# Altium PCB RC_Remote.PcbDoc
Units mm, origin at the board's own origin, x right, y up, seen from the top; angles counter-clockwise.
Board outline 100.08 x 75.56 mm, 2 copper layers (Top Layer, Bottom Layer); 23 components, 37 nets, 111 pads, 19 vias.
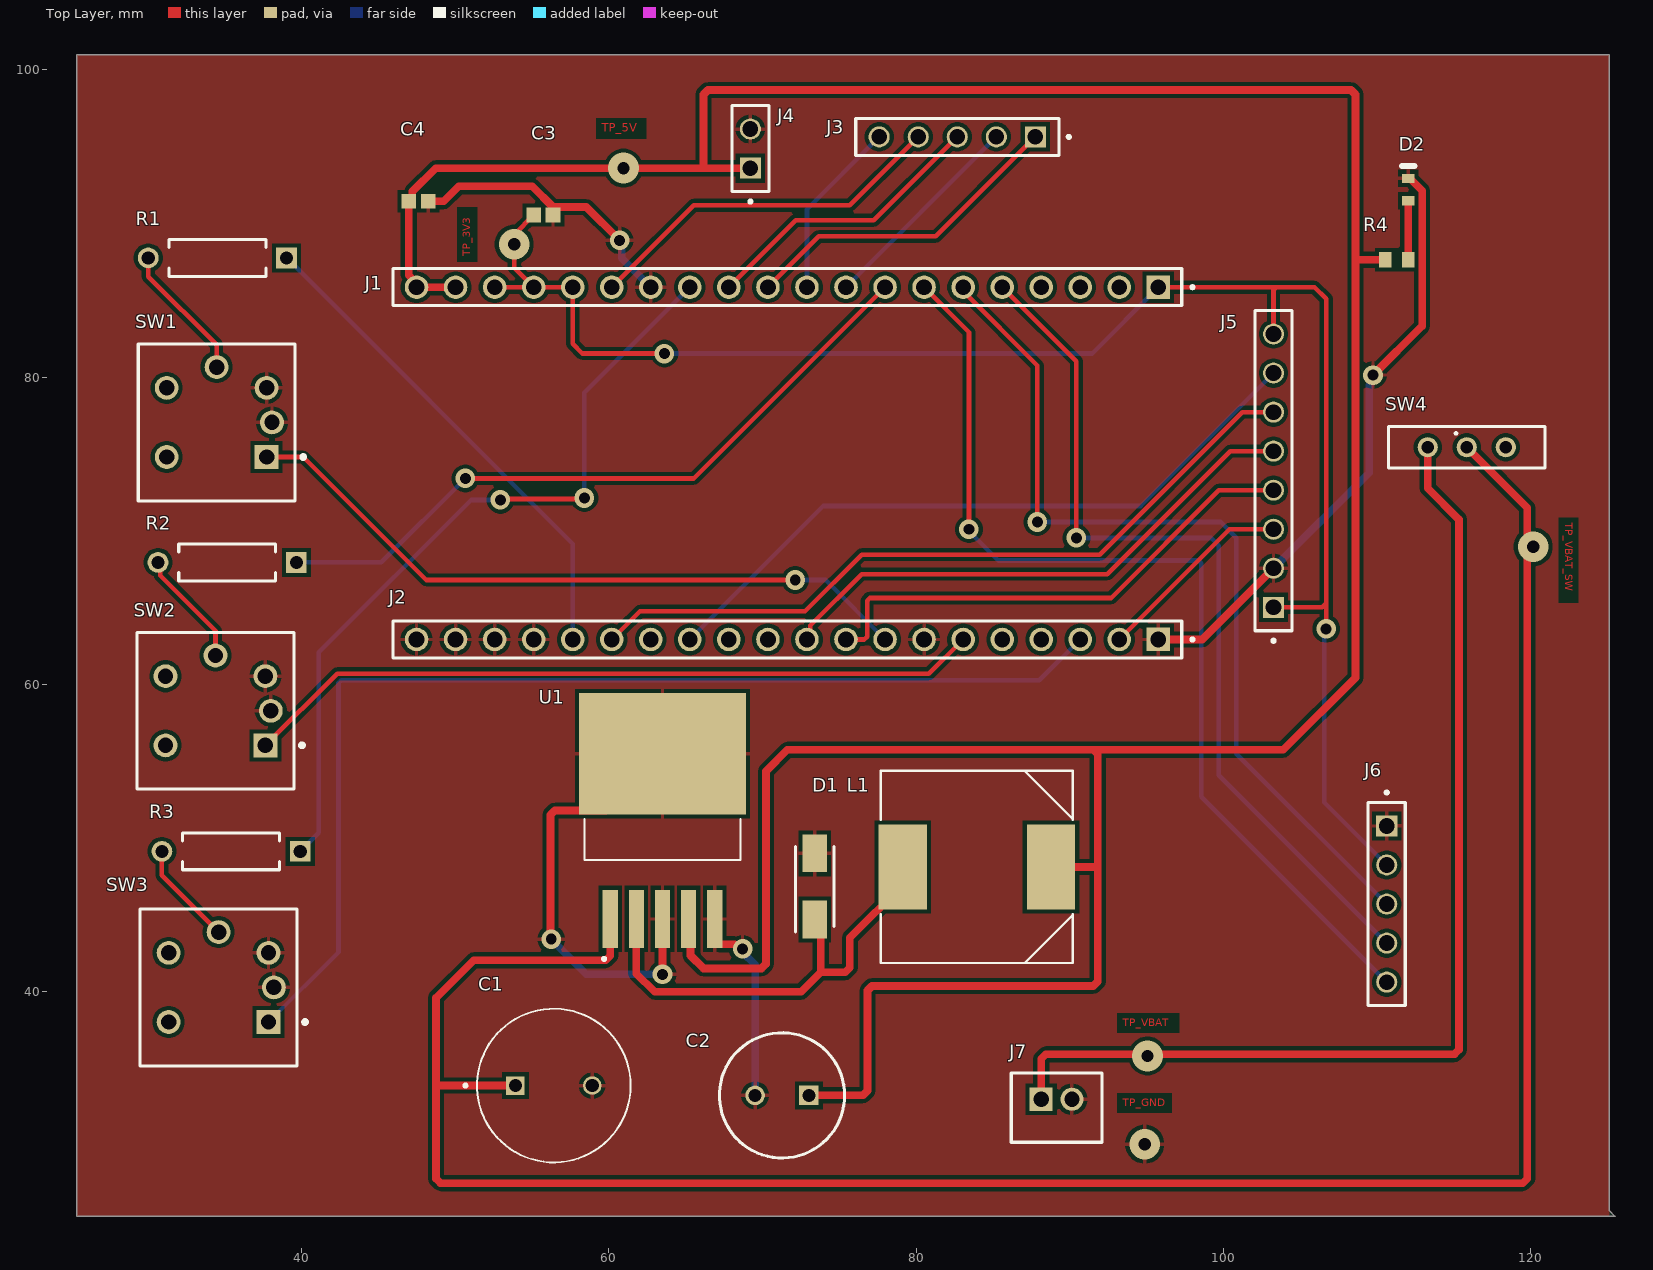
[diagram p0: Top Layer view]
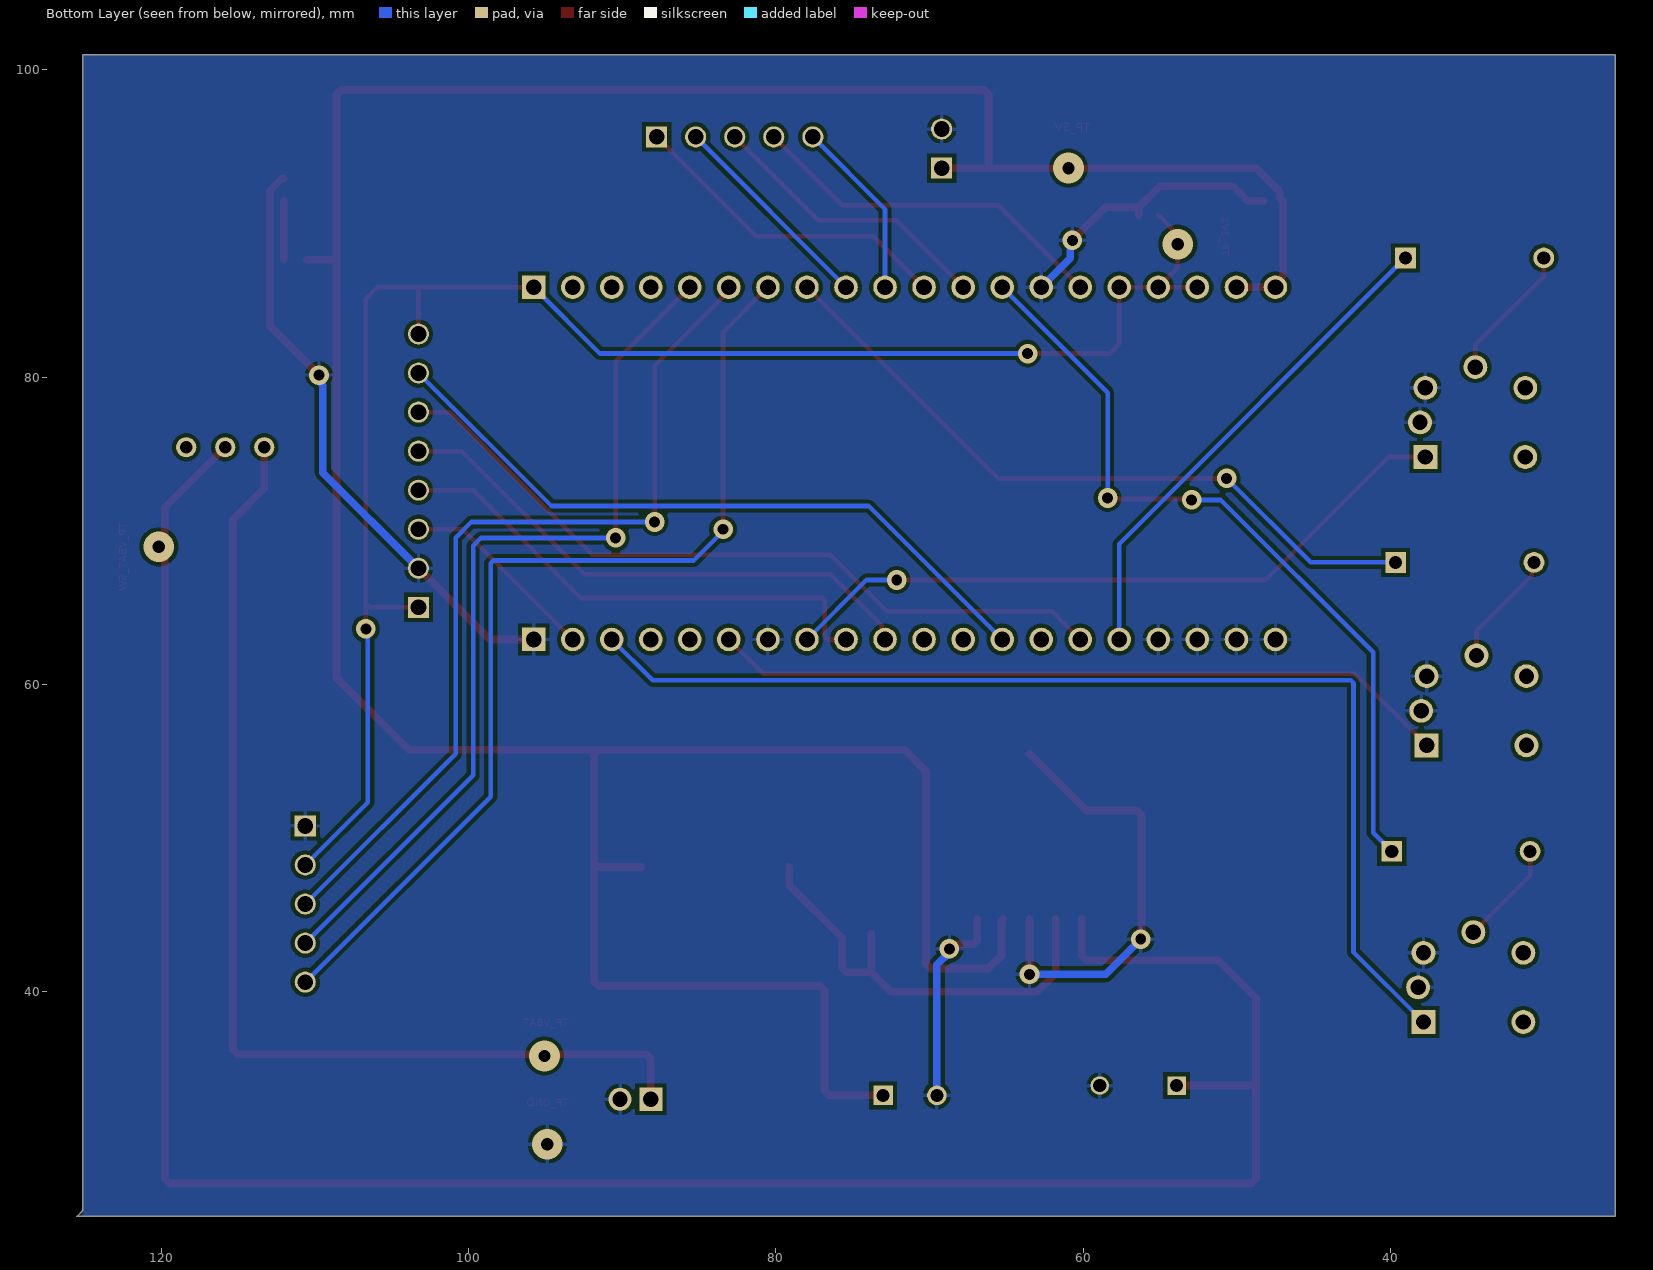
[diagram p1: Bottom Layer view, seen from below]

## Layer stack, top to bottom
Top Solder: solder mask 0.0102, Solder Resist, Dk 3.5
Top Layer: signal copper 0.0356
Dielectric 1: dielectric 0.32, FR-4, Dk 4.8
Bottom Layer: signal copper 0.0356
Bottom Solder: solder mask 0.0102, Solder Resist, Dk 3.5

## Board outline
25.4,25.4 125.476,25.4 125.095,25.781 125.095,100.965 25.4,100.965

## Design rules (kind name [scope] priority, off if disabled: settings)
Clearance [All] p1: gap=0.254 ignorepadtopadclearanceinfootprint=FALSE
MinimumSolderMaskSliver [All] p1: minsoldermaskwidth=0.09
PolygonConnect [All] p1: connectstyle=Relief reliefconductorwidth=0.254 reliefentries=4 polygonreliefangle="90 Angle" airgapwidth=0.254
RoutingVias [All] p1: holewidth=0.711 width=1.27 viastyle="Through Hole" minholewidth=0.711 minwidth=1.27 maxholewidth=0.711 maxwidth=1.27
SilkToSolderMaskClearance [IsPad] p1: minsilkscreentomaskgap=0.1 clearancetoexposedcopper=TRUE
SolderMaskExpansion [All] p1: expansion=0.09 istentingtop=FALSE
Width [All] p1: maxlimit=1 minlimit=0.2 preferedwidth=0.3 minimp=50.000000 maximp=50.000000 favimp=50.000000
28 further rules are at their usual default settings.

## Components (designator, comment, footprint, x,y, rotation, side; value= is the part's Value field where it differs from the comment)
C1 "EEUFM1E681" CAPPRD500W60D1000H2000 56.428,33.909 r0 top
C2 "EEU-FC1E471" CAPPRD350W65D815H2200 73.025,33.274 r180 top
C3 "Capacitor 100 nF +/-10% 50 V 0603" CAPC1608X90X40NL10T20 55.753,90.551 r0 top value=100nF
C4 "Capacitor 100 nF +/-10% 50 V 0603" CAPC1608X90X40NL10T20 47.625,91.44 r0 top value=100nF
D1 "CDBA540-HF" DIOM5225X250N 73.406,46.863 r90 top
D2 "TLMS1100-GS08" VISH-TLMX1100_V 112.014,92.202 r90 top
J1 "ESP32 Left Header" SAMTEC_SSQ-120-XX-X-S 71.628,85.852 r180 top
J2 "ESP32 Right Header" SAMTEC_SSQ-120-XX-X-S 71.628,62.932 r180 top
J3 "nRF24 Signals" SAMTEC_SSQ-105-02-T-S 82.677,95.631 r180 top
J4 "nRF24 Power" SAMTEC_SSQ-102-02-T-S 69.215,94.869 r90 top
J5 "TFT Display" SAMTEC_SSQ-108-02-T-S 103.251,73.914 r90 top
J6 "Joystick" SAMTEC_SSQ-105-02-T-S 110.617,45.72 r270 top
J7 "Battery Connector" JST-B2B-PH-K-S_V 89.138,32.47 r0 top
L1 "DR127-220-R" INDM125125X800N 83.947,48.133 r180 top
R1 "MFR-25FBF52-47R5" RESA60-630X240 34.544,87.757 r180 top value=47.5
R2 "MFR-25FBF52-47R5" RESA60-630X240 35.179,67.945 r180 top value=47.5
R3 "MFR-25FBF52-47R5" RESA60-630X240 35.433,49.149 r180 top value=47.5
R4 "RC0603JR-13150RL" RESC1608X55X25ML10T15 111.264,87.63 r0 top
SW1 "RC Mode" FP-B3W-9002-Y1N-MFG 34.492,77.053 r0 top
SW2 "Auto" FP-B3W-9002-Y1N-MFG 34.417,58.293 r0 top
SW3 "AI" FP-B3W-9002-Y1N-MFG 34.619,40.295 r0 top
SW4 "Power Switch" 450301014042 115.824,75.438 r0 top
U1 "LM2596S-5.0" TO170P1524X483-6N 63.5,51.149 r90 top

## Footprints (in the part's own frame and the unit in brackets; to place one, negate y for a bottom-side part, rotate by r counter-clockwise, add the part's x,y. Pads: shape width x height; smd on the part's side, far side on the other; paste and mask are expansions set on the pad)
450301014042 [mm]
  round 1.308 hole 0.8: 1(0,0) 2(-2.54,0) 3(2.54,0)
  silkscreen extent -5.1,-1.35 5.1,1.35
CAPC1608X90X40NL10T20 [mm] "Chip Capacitor, 2-Leads, Body 1.70x0.90mm, IPC Medium Density"
  rect 0.95x0.95 smd: 1(-0.625,0) 2(0.625,0)
  body extent -0.85,-0.45 0.85,0.45, height 0.9
CAPPRD350W65D815H2200 [mm]
  rect 1.275x1.275 hole 0.85: 1(0,0)
  round 1.275 hole 0.85: 2(3.5,0)
  silkscreen extent -2.33,-4.07 5.82,4.07, body extent -2.49,-4.25 6,4.25, height 22
CAPPRD500W60D1000H2000 [mm]
  round 1.2 hole 0.85: N(2.5,0)
  rect 1.2x1.2 / inner round 1.2 / far side rect 1.2x1.2 hole 0.85: P(-2.5,0)
  silkscreen extent -5.85,-5 5,5, body extent -5,-5 5,5, height 20
DIOM5225X250N [mm]
  rect 2.45x1.6 smd: 1(-2.15,0) 2(2.15,0)
  silkscreen extent -2.95,-1.25 2.6,1.25, body extent -2.6,-1.25 2.6,1.25, height 2.5
FP-B3W-9002-Y1N-MFG [mm]
  rect 1.55x1.55 hole 1 paste-2539.97 mask+0: 1(3.25,-2.25)
  round 1.55 hole 1 paste-2539.97 mask+0: 2(-3.25,-2.25) 3(3.25,2.25) 4(-3.25,2.25) 5(3.6,0) 6(0,3.6)
  silkscreen extent -5.1,-5.1 5.75,5.1, body extent -5.2,-5.2 5.2,5.2, height 0.25
INDM125125X800N [mil]
  rect 124x217 smd: 1(-190,0) 2(190,0)
  silkscreen extent -246,-246 246,246
JST-B2B-PH-K-S_V [mm] "Connector, 2-Leads, Body 5.9x4.5mm, Pitch 2mm"
  rect 1.5x1.5 hole 1: 1(-1,0.55)
  round 1.5 hole 1: 2(1,0.55)
  silkscreen extent -2.95,-2.25 2.95,2.25, body extent -2.95,-2.25 2.95,2.25, height 6
RESA60-630X240 [mm] "Axial Resistor, 2-Leads, Dia 2.4mm, Body Length 6.3mm"
  rect 1.35x1.35 hole 0.85: 1(-4.5,0)
  round 1.35 hole 0.85: 2(4.5,0)
  silkscreen extent -3.15,-1.2 3.15,1.2, body extent -4.77,-1.19 4.77,1.2, height 2.4
RESC1608X55X25ML10T15 [mm] "Chip Resistor, 2-Leads, Body 1.60x0.80mm, IPC Low Density"
  rect 0.8x1 smd: 1(-0.75,0) 2(0.75,0)
  body extent -0.85,-0.45 0.85,0.45, height 0.55
SAMTEC_SSQ-102-02-T-S [mm]
  rect 1.37x1.37 hole 1.02: 01(-1.27,0)
  round 1.37 hole 1.02: 02(1.27,0)
  silkscreen extent -3.54,-1.2 2.8,1.2
SAMTEC_SSQ-105-02-T-S [mm]
  rect 1.37x1.37 / inner round 1.37 / far side rect 1.37x1.37 hole 1.02: 01(-5.08,0)
  round 1.37 hole 1.02: 02(-2.54,0) 03(0,0) 04(2.54,0) 05(5.08,0)
  silkscreen extent -7.35,-1.2 6.61,1.2
SAMTEC_SSQ-108-02-T-S [mm]
  rect 1.37x1.37 / inner round 1.37 / far side rect 1.37x1.37 hole 1.02: 01(-8.89,0)
  round 1.37 hole 1.02: 02(-6.35,0) 03(-3.81,0) 04(-1.27,0) 05(1.27,0) 06(3.81,0) 07(6.35,0) 08(8.89,0)
  silkscreen extent -11.16,-1.2 10.42,1.2
SAMTEC_SSQ-120-XX-X-S [mm]
  rect 1.53x1.53 / inner round 1.53 / far side rect 1.53x1.53 hole 1.02: 01(-24.13,0)
  round 1.53 hole 1.02: 02(-21.59,0) 03(-19.05,0) 04(-16.51,0) 05(-13.97,0) 06(-11.43,0) 07(-8.89,0) 08(-6.35,0) 09(-3.81,0) 10(-1.27,0) 11(1.27,0) 12(3.81,0) 13(6.35,0) 14(8.89,0) 15(11.43,0) 16(13.97,0) 17(16.51,0) 18(19.05,0) 19(21.59,0) 20(24.13,0)
  silkscreen extent -26.45,-1.2 25.66,1.2
TO170P1524X483-6N [mm]
  rect 3.79x0.99 smd: 1(-6.4,3.4) 2(-6.4,1.7) 3(-6.4,0) 4(-6.4,-1.7) 5(-6.4,-3.4)
  rect 7.88x10.84 smd paste-6: 6(4.35,0)
  silkscreen extent -9.1,-5.08 0.09,5.08, body extent -7.18,-5.08 7.18,5.08, height 4.65
VISH-TLMX1100_V [mm] "SMD, 2-Leads, Body 1.6x0.8mm"
  rect 0.6x0.8 smd: 1(-0.725,0) 2(0.725,0)
  silkscreen extent 1.53,-0.4 1.53,0.4, body extent -0.8,-0.4 0.8,0.4, height 0.65

## Part data
C1: "680F 25V Aluminum Electrolytic Capacitors Radial, Can 5000 Hrs @ 105C", Package="RADIAL-2 Panasonic", Check_prices=https://www.snapeda.com/parts/EEUFM1E681/Panasonic/view-part/?ref=eda, Digi-Key_Part_Number=P12390-ND, MF=Panasonic, MP=EEUFM1E681, Purchase-URL=https://pricing.snapeda.com/search?q=EEUFM1E681&ref=eda, SnapEDA_Link=https://www.snapeda.com/parts/EEUFM1E681/Panasonic/view-part/?ref=snap
C2: "Capacitor Polarised", Manufacturer_Name=Panasonic, Mouser Part Number=667-EEU-FC1E471, Arrow Part Number=EEU-FC1E471, Arrow Price/Stock=https://www.arrow.com/en/products/eeu-fc1e471/panasonic?region=europe, Datasheet Link=http://industrial.panasonic.com/cdbs/www-data/pdf/RDF0000/ABA0000C1209.pdf, Height=22mm, Manufacturer_Part_Number=EEU-FC1E471, Mouser Price/Stock=https://www.mouser.co.uk/ProductDetail/Panasonic/EEU-FC1E471?qs=%2FUrJKH1balAe6BYeommeDg%3D%3D
C3 C4: library part CMP-001-00017-6, "Chip Capacitor, 100 nF, +/- 10%, 50 V, 0603 (1608 Metric)", Capacitor Type=Ceramic, Case/Package=0603, Max Operating Temperature=125°C, Min Operating Temperature=-55°C, Tolerance=10%, Voltage Rating=50V, Mounting Technology=SM, Pins=2, RoHS Compliant=True
D1: "Schottky Diode", Manufacturer_Name="Comchip Technology", Mouser Part Number=750-CDBA540-HF, Arrow Part Number=CDBA540-HF, Arrow Price/Stock=https://www.arrow.com/en/products/cdba540-hf/comchip-technology?region=nac, Datasheet Link=https://datasheet.datasheetarchive.com/originals/distributors/DKDS-12/228866.pdf, Height=2.5mm, Manufacturer_Part_Number=CDBA540-HF, Mouser Price/Stock=https://www.mouser.co.uk/ProductDetail/Comchip-Technology/CDBA540-HF?qs=XEIV%2Fho1H6f2kHo2SATLRw%3D%3D
D2: library part CMP-007-00030-2, "Red Led, 20mA, 2.1 V, -40 to 100 degC, 2-Pin SMD (0603), RoHS, Tape and Reel", Case/Package=0603, Colour=Red, Forward Current=20mA, Forward Voltage=2.1V, Manufacturer="Vishay Semiconductor", Max Operating Temperature=100°C, Min Operating Temperature=-40°C, Package Description="2-Pin Surface Mount Device, Body 1.6 x 0.8 mm", Package Quantity=3000, Package Reference=TLMX1100, Power=90mW, Datasheet URL=http://www.vishay.com/docs/83173/tlmb1100.pdf, Datasheet Version="Rev. 2.7, 03/2016", Illumination Colour=Red, Lens Style=Clear, Luminous Intensity=63mcd, Manufacturer URL=http://www.vishay.com/, Mounting Technology=SM, Nominal Vf=2.1V, Packaging=TapeandReel, Pins=2, RoHS Compliant=True, Viewing Angle=160degrees
J1 J2: library part SSQ-120-XX-X-S, "20 Position Receptacle Connector 0.100 (2.54mm) Through Hole Gold", Package=None, Check_prices=https://www.snapeda.com/parts/SSQ-120-22-F-S/Samtec/view-part/?ref=eda, MF=Samtec, MP=SSQ-120-22-F-S, SnapEDA_Link=https://www.snapeda.com/parts/SSQ-120-22-F-S/Samtec/view-part/?ref=snap
J3 J6: library part SSQ-105-02-T-S, "Headers & Wire Housings .100 Tiger Buy Socket Strip, Square Tail", Package=None, Check_prices=https://www.snapeda.com/parts/SSQ-105-02-T-S/Samtec/view-part/?ref=eda, MF=Samtec, MP=SSQ-105-02-T-S, SnapEDA_Link=https://www.snapeda.com/parts/SSQ-105-02-T-S/Samtec/view-part/?ref=snap
J4: library part SSQ-102-02-T-S, "SSQ Series .100 Tiger Buyâ„¢ Socket Strip, Square Tail", Package=None, Availability="In Stock", Check_prices=https://www.snapeda.com/parts/SSQ-102-02-T-S/Samtec+Inc./view-part/?ref=eda, MF="Samtec Inc.", MP=SSQ-102-02-T-S, Price=None, Purchase-URL=https://pricing.snapeda.com/search/part/SSQ-102-02-T-S/?ref=eda, SnapEDA_Link=https://www.snapeda.com/parts/SSQ-102-02-T-S/Samtec+Inc./view-part/?ref=snap
J5: library part SSQ-108-02-T-S, "Headers & Wire Housings .100 Tiger Buy Socket Strip, Square Tail", Package=None, Check_prices=https://www.snapeda.com/parts/SSQ-108-02-T-S/Samtec/view-part/?ref=eda, MF=Samtec, MP=SSQ-108-02-T-S, SnapEDA_Link=https://www.snapeda.com/parts/SSQ-108-02-T-S/Samtec/view-part/?ref=snap
J7: library part CMP-2000-05162-1, "Male Header, Pitch 2 mm, 1 x 2 Position, Height 6 mm, Tail Length 3.4 mm, -25 to 85 degC, RoHS, Bulk", Manufacturer=JST, Datasheet URL=http://datasheet.octopart.com/B2B-PH-K-S%28LF%29%28SN%29-JST-datasheet-8324864.pdf, Datasheet Version=Nov-08, Manufacturer URL=http://www.jst.com/home2.html, No of Positions=2, Pitch=2mm, Style/Orientation=StraightHeader/Plug, Termination=Crimp, Type=ShroudedHeader
L1: "22ÂµH Shielded Wirewound Inductor 4A 39.1mOhm Nonstandard", Package="Nonstandard Eaton", Digi-Key_Part_Number=513-1044-1-ND, Digi-Key_Purchase_URL=https://www.digikey.com/product-detail/en/eaton-electronics-division/DR127-220-R/513-1044-1-ND/695325?utm_source=snapeda&utm_medium=aggregator&utm_campaign=symbol, MF=Eaton, MP=DR127-220-R, SnapEDA_Link=https://www.snapeda.com/parts/DR127-220-R/Eaton/view-part/2774174/?ref=snap
R1 R2 R3: library part CMP-009-00058-4, "Axial Resistor, 47.5 Ohm, +/- 1%, 0.25 W, -55 to 155 degC, 2-Pin THD, RoHS, Bulk", Case/Package=Axial, Manufacturer=Yageo, Max Operating Temperature=155°C, Min Operating Temperature=-55°C, Package Description="2-Pin Axial Lead, Dia 2.4 mm, Body Length 6.3 mm", Package Quantity=200, Package Reference=MFR-25, Power=250mW, Tolerance=1%, Voltage Rating=250V, Datasheet URL=http://www.yageo.com/documents/recent/Yageo%20LR_MFR_2013.pdf, Datasheet Version=Apr-13, Manufacturer URL=http://www.yageo.com/, Mounting Technology=TH, Packaging=Bulk, RoHS Compliant=True
R4: library part CMP-2000-04317-1, Manufacturer=Yageo, Part Number=RC0603JR-13150RL
SW1 SW2 SW3: library part CMP-08834-000016-1, "SWITCH TACTILE SPST-NO 0.05A 24V", Actuator Color=White, Contact Resistance=100mR, Current Rating=50mA, Illumination Color=Yellow, Max Operating Temperature=70°C, Max Voltage Rating (DC)=24V, Min Operating Temperature=-25°C, Operating Force=2.26N, Package Quantity=300, Contact Plating=Silver, Illumination Type=Illuminated, Mechanical Life=300000Cycles, Mount="Through Hole", Orientation=Straight, Packaging=Bulk, Series=B3W-9, Switch Function=Off-Mom, Switch Travel=0.25mm, Termination="PC Pin", Throw Configuration=SPST, Voltage Rating (DC)=24V
SW4: library part 450301014042, Package=None, Availability=Unavailable, MF="{'manufacturer': u'W\xfcrth Elektronik'}", MP=450301014042, Price=None
U1: "SIMPLE SWITCHERÂ® 4.5V to 40V, 3A Low Component Count Step-Down Regulator", Package="TO-263-5 Texas Instruments", Check_prices=https://www.snapeda.com/parts/LM2596S-5.0/NOPB/Texas+Instruments/view-part/?ref=eda, MF="Texas Instruments", MP=LM2596S-5.0/NOPB, SnapEDA_Link=https://www.snapeda.com/parts/LM2596S-5.0/NOPB/Texas+Instruments/view-part/?ref=snap

## Via types
v1: diameter 1.27, hole 0.711, Top Layer to Bottom Layer, 14 vias
v2: diameter 2, hole 0.8, Top Layer to Bottom Layer, 5 vias

## Nets (pads, with @x,y where several pads share a name; then routed paths per layer and width w, separated by ;. In a path a pad name is that pad's centre, name@x,y a point inside that pad or via, vN(x,y) a via of type N, cw(c..) or ccw(c..) an arc to the next point about the centre after c; other vN are vias at no path point)
3V3: C3.1 J1.01 J1.16 J1.17 J1.18 J5.01 J5.08 J6.02 | length 111.1
  Top Layer w0.3: J1.18 J1.17 ; C3.1 53.848,89.271 53.848,87.122 J1.17 ; v1(63.627,81.534) 58.293,81.534 57.658,82.169 J1.16 J1.17 ; J1.01 103.441,85.852 ; J5.01 106.426,65.024 106.68,65.278 ; J5.08 103.251,85.661 103.441,85.852 ; v1(106.68,63.627) 106.68,65.278 ; 103.441,85.852 105.918,85.852 106.68,85.09 106.68,65.278
  Bottom Layer w0.3: v1(63.627,81.534) 91.44,81.534 J1.01 ; v1(106.68,63.627) 106.553,63.5 106.553,52.324 J6.02
  other v2: 53.848,88.646
5V: C2.1 C4.1 J1.19 J1.20 J4.01 L1.1 R4.1 U1.4 | length 224.1
  Top Layer w0.5: J1.19 J1.20 47.498,86.131 47,86.629 C4.1 47.225,91.665 47.225,92.078 48.746,93.599 66.167,93.599 ; U1.4 65.322,44.627 65.322,42.374 66.167,41.529 69.938,41.529 70.231,41.822 70.231,54.356 71.628,55.753 91.528,55.753 ; J4.01 66.167,93.599 ; C2.1 76.542,33.274 76.835,33.567 76.835,40.093 77.128,40.386 91.528,40.386 91.821,40.679 91.821,48.133 ; L1.1 91.821,48.133 ; R4.1 108.585,87.63 ; 66.167,93.599 66.167,98.386 66.46,98.679 108.292,98.679 108.585,98.386 108.585,87.63 ; 91.528,55.753 103.886,55.753 108.585,60.452 108.585,87.63 ; 91.528,55.753 91.821,55.46 91.821,48.133
  other v2: 60.96,93.599
EN: J1.02
GND: C1.N C2.2 C3.2 C4.2 D1.2 D2.2 J1.14 J2.01 J2.07 J2.17 J2.18 J2.19 J2.20 J4.02 J5.02 J6.01 J7.2 SW1.3 SW1.5 SW2.3 SW2.5 SW3.3 SW3.5 U1.3 U1.5 U1.6 | length 100.1
  Top Layer w0.5: C4.2 49.276,91.44 50.255,92.419 55.028,92.419 56.378,91.069 ; v1(56.261,43.434) 56.213,43.482 56.213,51.516 56.506,51.809 59.81,51.809 U1.6 ; C3.2 56.378,91.069 ; v1(60.706,88.9) 58.537,91.069 56.378,91.069 ; v1(63.5,41.148) U1.3 ; U1.5 66.9,43.349 67.145,43.104 68.194,43.104 68.499,42.799 v1(68.707,42.799) ; J2.01 98.619,62.932 J5.02 ; v1(109.724,80.137) 112.918,83.331 112.918,92.123 112.114,92.927 D2.2
  Bottom Layer w0.5: v1(56.261,43.434) 58.547,41.148 v1(63.5,41.148) ; v1(60.706,88.9) 60.853,88.753 60.853,87.737 J1.14 ; v1(68.707,42.799) 68.707,42.591 69.525,41.773 C2.2 ; J5.02 109.474,73.787 109.474,79.459 109.577,79.562 109.577,79.99 v1(109.724,80.137)
  other v2: 94.869,30.099
GPIO0: J2.14
GPIO02: J2.15 J5.06 | length 49.2
  Top Layer w0.3: J2.15 62.036,64.77 72.771,64.77 76.454,68.453 91.948,68.453 101.219,77.724 J5.06
GPIO04: J2.13 J5.07 | length 45.2
  Bottom Layer w0.3: J2.13 73.959,71.613 94.6,71.613 J5.07
GPIO05: J2.10 J5.05 | length 35.8
  Top Layer w0.3: J2.10 73.11,63.144 73.11,63.839 76.454,67.183 92.435,67.183 100.436,75.184 J5.05
GPIO12: J1.13 R3.1 | length 51.4
  Top Layer w0.3: v1(52.959,72.009) 53.023,72.072 58.356,72.072 v1(58.42,72.136)
  Bottom Layer w0.3: R3.1 41.148,50.364 41.148,62.103 51.054,72.009 v1(52.959,72.009) ; v1(58.42,72.136) 58.42,78.994 J1.13
GPIO13: J1.15 J3.04 | length 24
  Top Layer w0.3: J1.15 65.532,91.186 75.692,91.186 J3.04
GPIO14: J1.12 J3.03 | length 18.9
  Top Layer w0.3: J1.12 72.169,90.203 77.249,90.203 J3.03
GPIO15: J2.16 R1.1 | length 32.5
  Bottom Layer w0.3: R1.1 57.658,69.143 J2.16
GPIO16: J2.12
GPIO17: J2.11
GPIO18: J2.09 J5.04 | length 33.2
  Top Layer w0.3: J2.09 76.633,62.932 76.809,63.108 76.809,65.457 76.985,65.633 92.684,65.633 99.695,72.644 J5.04
GPIO19: J2.08 SW1.1 | length 45.2
  Top Layer w0.3: SW1.1 40.132,74.803 48.133,66.802 v1(72.136,66.802)
  Bottom Layer w0.3: v1(72.136,66.802) 74.108,66.802 J2.08
GPIO21: J2.06 SW2.1 | length 48.2
  Top Layer w0.3: SW2.1 42.33,60.706 80.832,60.706 J2.06
GPIO22: J2.03 SW3.1 | length 73.4
  Bottom Layer w0.3: SW3.1 42.418,42.594 42.418,60.101 42.594,60.276 88.022,60.276 J2.03
GPIO23: J2.02 J5.03 | length 13
  Top Layer w0.3: J2.02 100.39,70.104 J5.03
GPIO25: J1.09 J3.02 | length 13.8
  Bottom Layer w0.3: J1.09 J3.02
GPIO26: J1.10 J3.05 | length 11.7
  Bottom Layer w0.3: J1.10 72.898,90.932 J3.05
GPIO27: J1.11 J3.01 | length 21.4
  Top Layer w0.3: J1.11 73.66,89.154 81.28,89.154 J3.01
GPIO32: J1.07 J6.05 | length 65.3
  Top Layer w0.3: J1.07 83.439,82.931 v1(83.439,70.104)
  Bottom Layer w0.3: v1(83.439,70.104) 83.439,69.977 85.344,68.072 98.376,68.072 98.552,67.896 98.552,52.705 J6.05
GPIO33: J1.08 R2.1 | length 45.7
  Top Layer w0.3: v1(50.673,73.406) 65.532,73.406 J1.08
  Bottom Layer w0.3: R2.1 45.212,67.945 v1(50.673,73.406)
GPIO34: J1.05 J6.04 | length 58.2
  Top Layer w0.3: J1.05 90.424,81.026 v1(90.424,69.535)
  Bottom Layer w0.3: v1(90.424,69.535) 99.199,69.535 99.695,69.039 99.695,54.102 J6.04
GPIO35: J1.06 J6.03 | length 58.5
  Top Layer w0.3: J1.06 83.058,85.584 87.884,80.758 v1(87.884,70.574)
  Bottom Layer w0.3: v1(87.884,70.574) 99.811,70.574 100.838,69.547 100.838,55.499 J6.03
GPIO36: J1.03
GPIO39: J1.04
NetD1_1: D1.1 L1.2 U1.2 | length 29.1
  Top Layer w0.5: U1.2 61.8,41.197 62.992,40.005 68.831,40.005 72.517,40.005 73.787,41.275 ; D1.1@73.787,43.824 73.787,41.275 ; L1.2 79.121,46.952 75.692,43.523 75.692,41.568 75.399,41.275 73.787,41.275
NetD2_1: D2.1 R4.2 | length 3.8
  Top Layer w0.5: R4.2 D2.1
NetR1_2: R1.2 SW1.6 | length 8.9
  Top Layer w0.3: R1.2 30.044,86.542 34.492,82.094 SW1.6
NetR2_2: R2.2 SW2.6 | length 7.6
  Top Layer w0.3: R2.2 30.821,67.803 30.821,67.096 34.417,63.5 SW2.6
NetR3_2: R3.2 SW3.6 | length 6.8
  Top Layer w0.3: R3.2 30.933,47.581 SW3.6
RX: J2.05
TX: J2.04
VBAT: J7.1 SW4.2 | length 70.1
  Top Layer w0.5: J7.1 88.138,35.648 88.431,35.941 115.023,35.941 115.316,36.234 115.316,70.739 113.284,72.771 SW4.2
  other v2: 95.057,35.836
VBAT_SW: C1.P SW4.1 U1.1 | length 152.3
  Top Layer w0.5: C1.P 48.939,33.909 48.768,33.738 ; U1.1 60.1,42.359 59.807,42.066 51.21,42.066 48.768,39.624 48.768,33.738 ; SW4.1 119.761,71.501 119.761,27.852 119.468,27.559 49.061,27.559 48.768,27.852 48.768,33.738
  other v2: 120.142,68.961
pads on no net: SW1.2 SW1.4 SW2.2 SW2.4 SW3.2 SW3.4 SW4.3

## Polygon pours and split planes (outlines as drawn)
GND on Top Layer "GND_L01_P001" (solid, remove dead copper, pour order 1): 25.4,100.965 25.4,25.4 125.095,25.4 125.095,100.965
GND on Bottom Layer "GND_L02_P000" (solid, remove dead copper, pour order 0): 25.4,100.965 25.4,25.4 125.095,25.4 125.095,100.965

## Other copper
Top Layer:
  text "TP_5V" at 59.536,95.95 h0.55
  text "TP_3V3" at 50.998,87.857 h0.5 r90
  text "TP_VBAT_SW" at 122.23,70.512 h0.5 r270
  text "TP_VBAT" at 93.445,37.775 h0.5
  text "TP_GND" at 93.445,32.568 h0.5